# EAGLE board attiny85_LED (EAGLE 9.3.0)
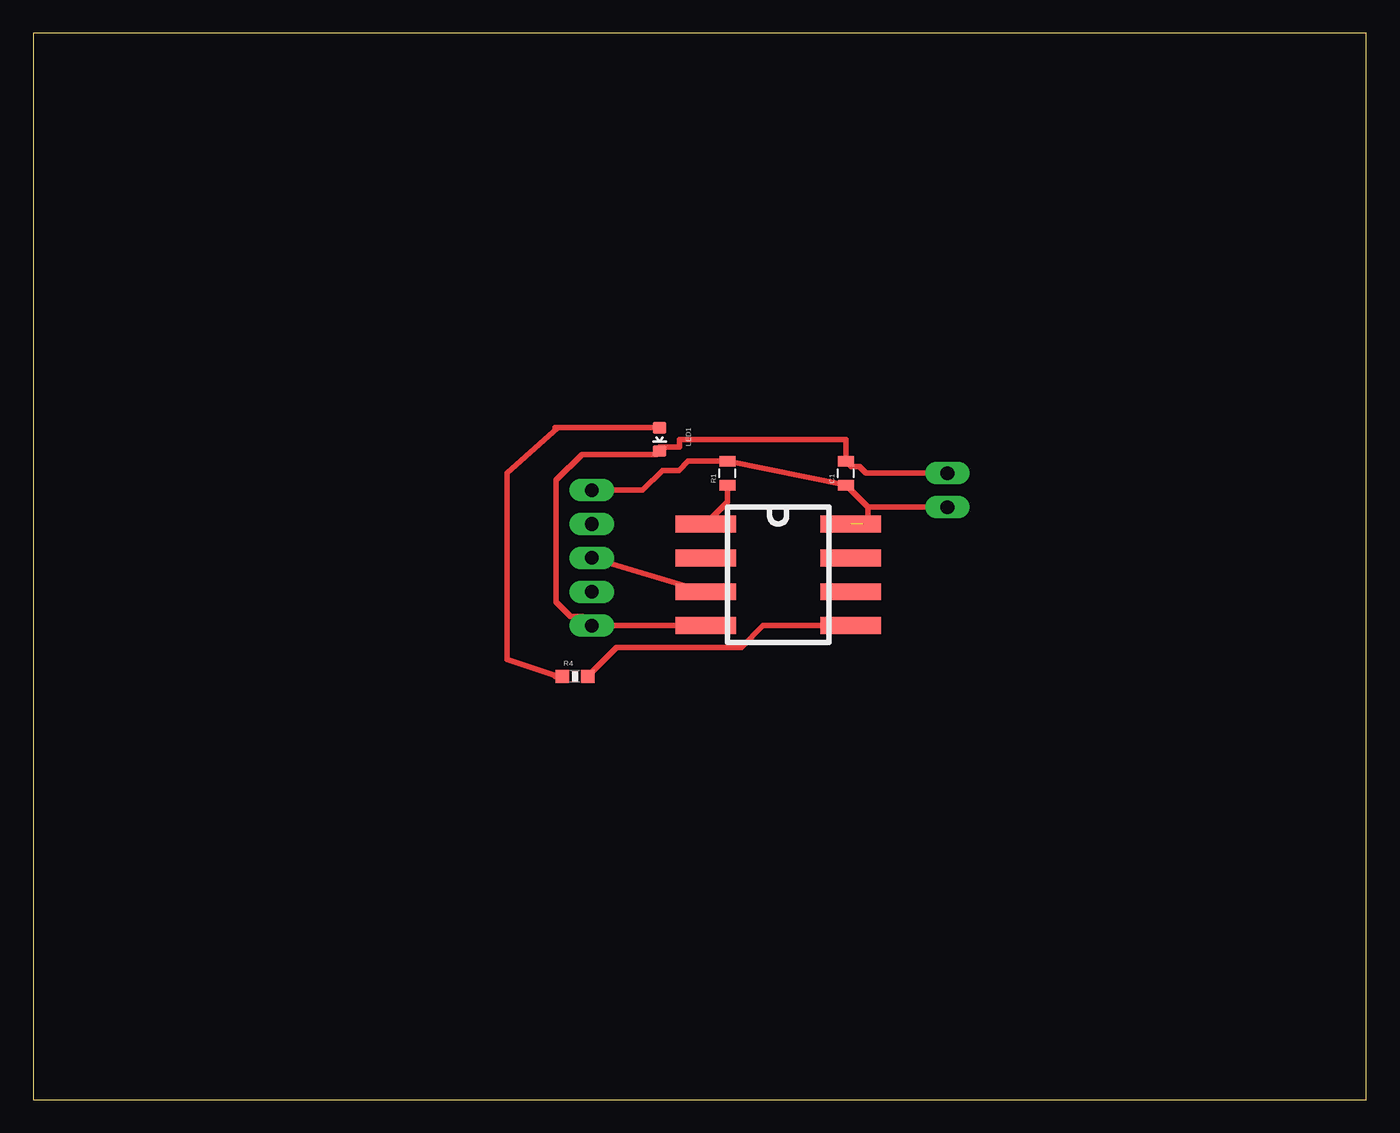
[diagram p0: board, top side]

Size 100 x 80 mm. Coordinates in mm from the lower left corner, seen from the top.
Outline: 0,0 100,0 100,80 0,80 0,0
Copper layers (1*16): Top 0.035mm / dielectric 1.5mm / Bottom 0.035mm
Design rules "default": minimum track width 16mil, minimum drill 0.8mm, track to track 0.8mm, track to pad 0.8mm, pad to pad 0.8mm, via to via 0.8mm, smd to smd 0mil, copper to edge 1mil, drill to drill 1mil, minimum pad ring 10mil, minimum via ring 10mil, stop-mask expansion 1mil, vias tented up to drill 30mil, thermal gap 10mil

## Footprints (pad centres in the part's own frame; a part is rotated, then mirrored left to right if it is on the bottom)
0805 = smd 0.8 x 1.2: 1 -0.9,0; 2 0.9,0
LED-0603 = smd 1 x 0.9: A 0,-0.877; C 0,0.877
HEADER-5 = drill 1.016 pad 1.676 long: 1 0,0; 2 0,2.54; 3 0,5.08; 4 0,7.62; 5 0,10.16
0603-RES = smd 1 x 1: 1 -0.95,0; 2 0.95,0
SOCKET-8PIN-BENT = smd 4.54 x 1.27: 1 -5.445,3.81; 2 -5.445,1.27; 3 -5.445,-1.27; 4 -5.445,-3.81; 5 5.445,-3.81; 6 5.445,-1.27; 7 5.445,1.27; 8 5.445,3.81
HEADER-2 = drill 1.016 pad 1.676 long: 1 0,0; 2 0,2.54

## Placement (x,y rotation side)
C1  0.1uF  [0805]  60.96,46.99 90 top
LED1  [LED-0603]  46.99,49.53 180 top
POTENTIOMETER  HEADER-5  [HEADER-5]  41.91,45.72 180 top
R1  10k  [0805]  52.07,46.99 90 top
R4  [0603-RES]  40.64,31.75 0 top
U$1  ATTINY85-SOCKET-BENT  [SOCKET-8PIN-BENT]  55.88,39.37 0 top
U$3  HEADER-2  [HEADER-2]  68.58,46.99 180 top

## Library data of the parts
C1 LED1 POTENTIOMETER R1 R4 U$1 U$3 = homemade-hardware

## Nets
5V: C1.1 POTENTIOMETER.1 R1.2 U$1.8 U$3.2
GND: C1.2 LED1.C POTENTIOMETER.5 U$1.4 U$3.1
N$1: LED1.A R4.1
N$3: R4.2 U$1.5
RESET: R1.1 U$1.1
SENSOR: POTENTIOMETER.3 U$1.3

## Tracks (layer width: path | path; a pad name or v marks a point on that pad's centre or on a via)
5V  (1 unrouted)
  Top 0.406: U$3.2 62.6,44.45 | 62.6,44.45 C1.1 R1.2 49.14,47.89 48.45,47.2 47.2,47.2 45.72,45.72 POTENTIOMETER.1 | 62.6,44.45 62.6,43.55 62.23,43.18
GND
  Top 0.406: U$3.1 62.48,46.99 61.98,47.49 61.36,47.49 C1.2 60.96,49.53 48.49,49.53 48.49,48.95 46.99,48.95 LED1.C 46.74,48.41 41.15,48.41 39.23,46.48 39.23,37.34 40.31,36.26 41.21,36.26 POTENTIOMETER.5 U$1.4
N$1
  Top 0.406: LED1.A 39.37,50.41 | 39.37,50.41 39.13,50.41 | 39.13,31.75 39.37,31.75 | 39.37,31.75 R4.1 | 39.37,50.41 35.56,46.99 35.56,33.02 39.37,31.75
N$3
  Top 0.406: R4.2 43.76,33.92 53.12,33.92 54.76,35.56 U$1.5
RESET
  Top 0.406: R1.1 52.07,44.81 U$1.1
SENSOR
  Top 0.406: POTENTIOMETER.3 U$1.3